# Altium PCB MARK1_AUDIO_PMOD.PcbDoc
Units mil, origin at the board's own origin, x right, y up, seen from the top; angles counter-clockwise.
Board outline 3000 x 2300 mil, 2 copper layers (Top Layer, Bottom Layer); 26 components, 23 nets, 74 pads, 0 vias.
Unrouted connection lines stored in the file: 47.
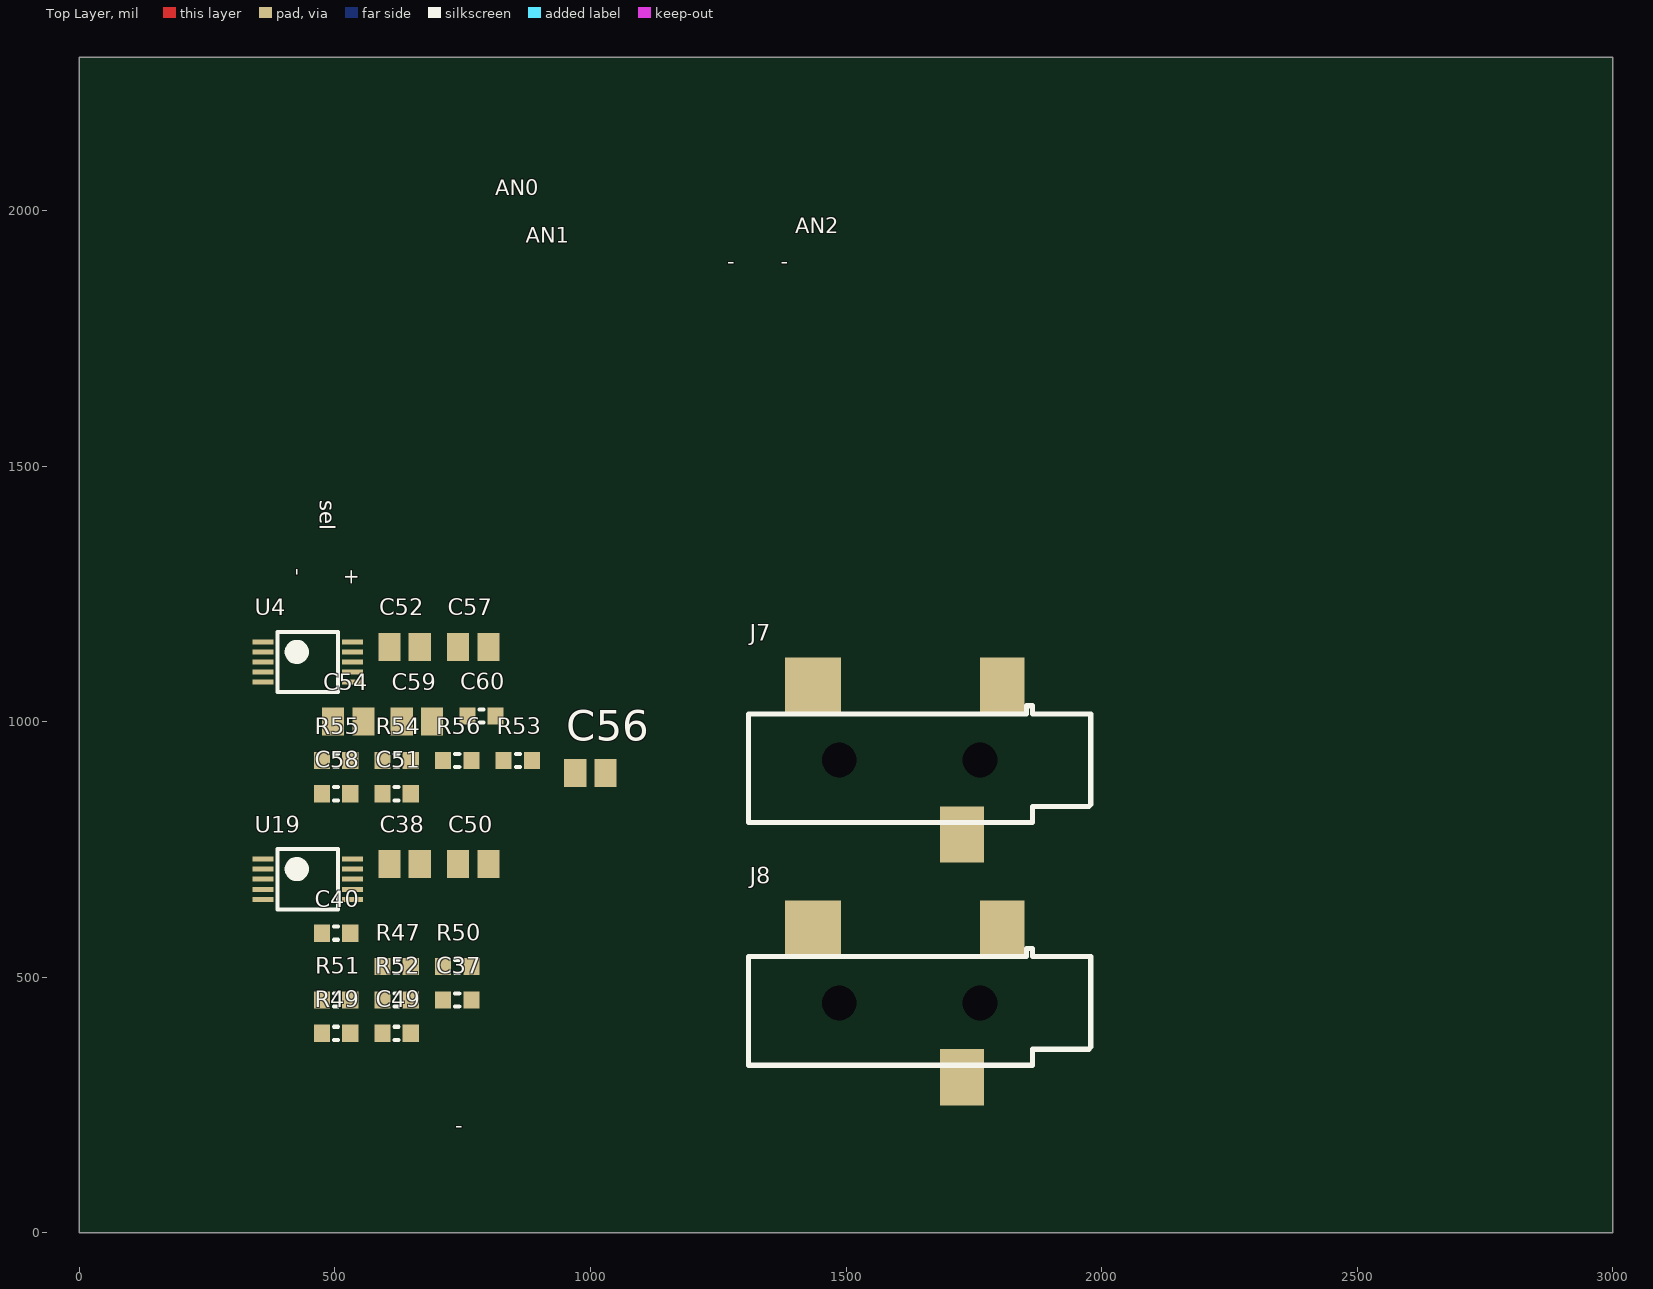
[diagram p0: Top Layer view]
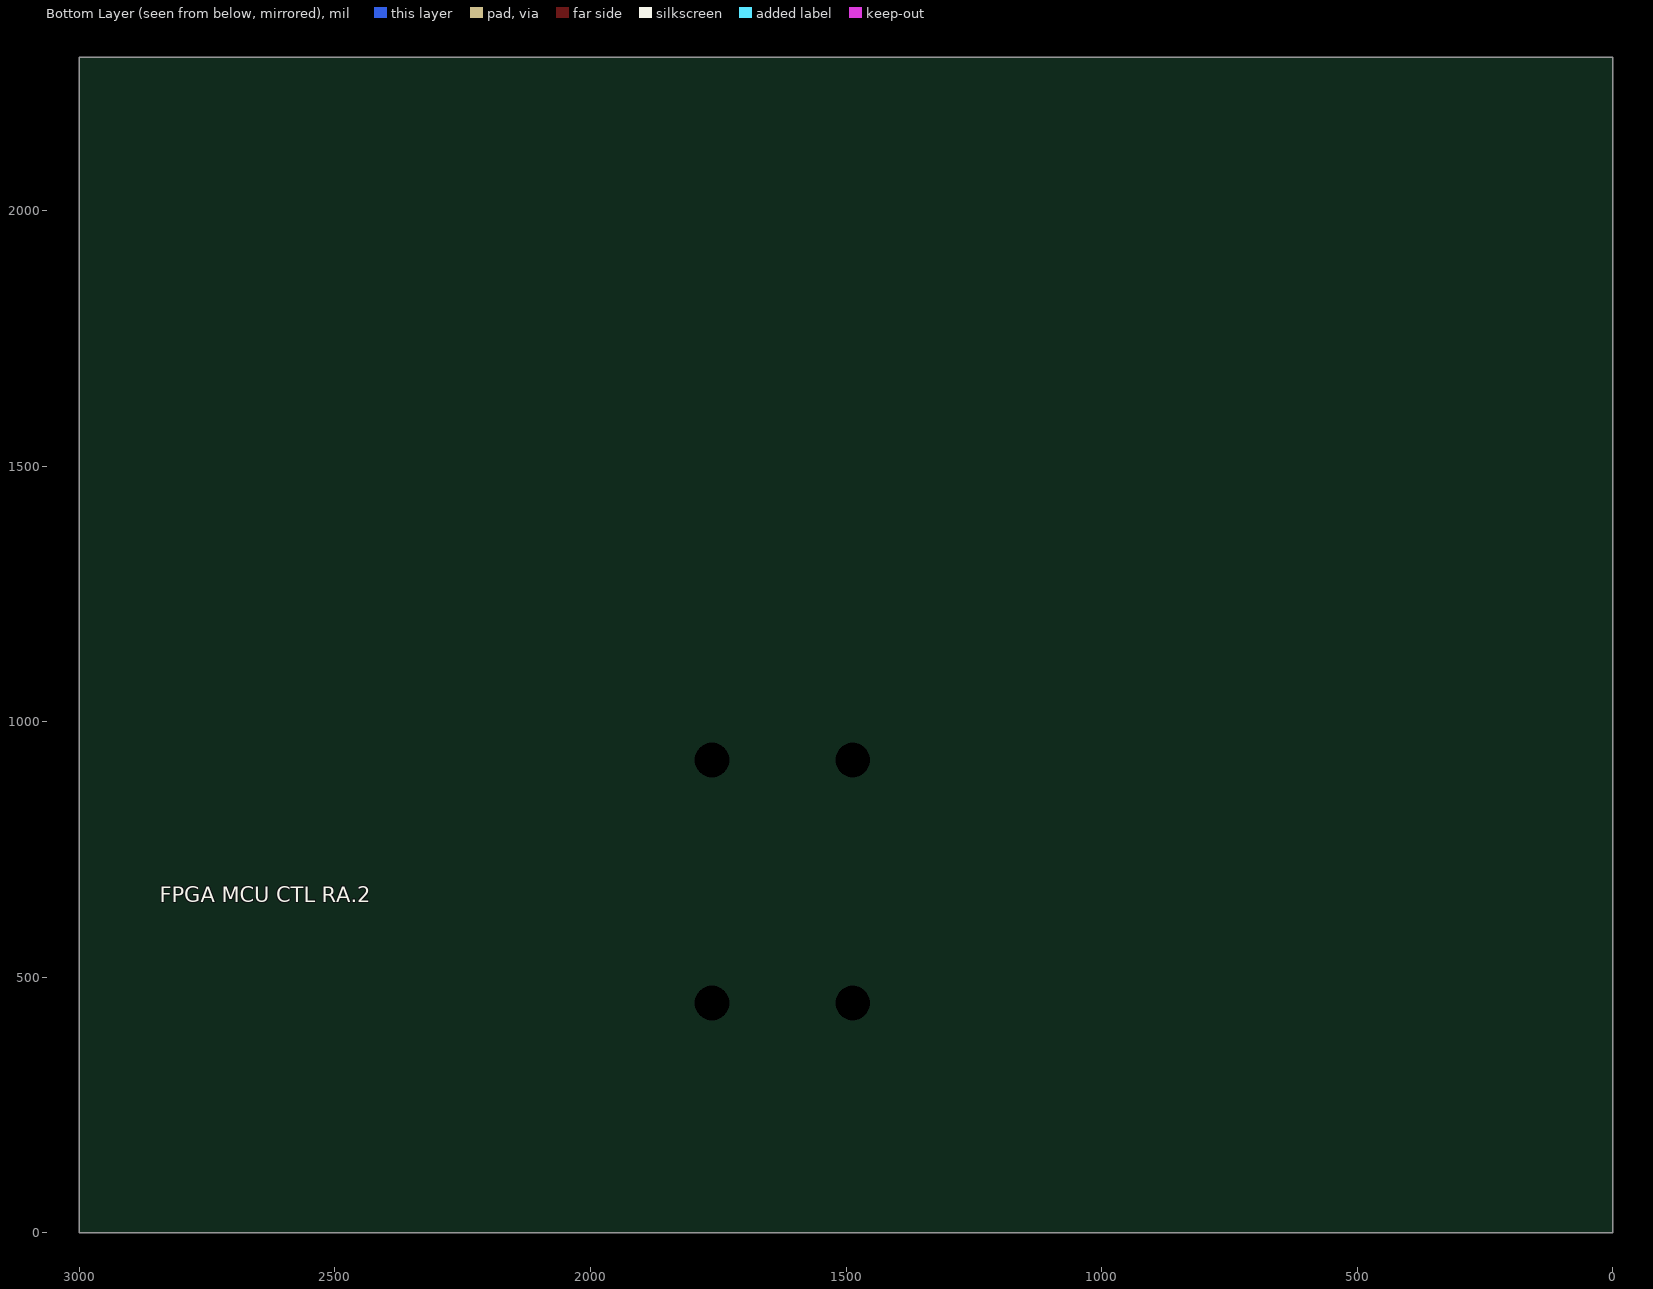
[diagram p1: Bottom Layer view, seen from below]

## Layer stack, top to bottom
Top Layer: signal copper 1.4
Dielectric: dielectric 12.6, FR-4, Dk 4.8
Bottom Layer: signal copper 1.4

## Board outline
0,0 0,2300 3000,2300 3000,0

## Design rules (kind name [scope] priority, off if disabled: settings)
Clearance Poly [InPoly] p1: gap=10
Clearance [All] p2: gap=6
ComponentClearance LEDS+Mounts [(HasFootprint('LTM-450')) vs (HasFootprint('LED T1-3/4 GREEN - 0.45" STANDOFF') OR HasFootprint('LED T1-3/4 RED -  0.45" STANDOFF'))] p1: gap=0 collisioncheckmode=3 verticalgap=0 showdistances=FALSE
ComponentClearance ComponentClearance_1 [OnLayer('Mechanical 1')] p2: gap=0 collisioncheckmode=3 verticalgap=0 showdistances=FALSE
ComponentClearance [All] p3: gap=10 collisioncheckmode=3 verticalgap=10 showdistances=FALSE
Height [All] p1: minheight=0 maxheight=1500 prefheight=500
HoleSize [All] p1: absolutevalues=TRUE maxlimit=250 minlimit=1 maxpercent=80.000 minpercent=20.000
HoleToHoleClearance [All] p1: gap=2 allowstackedmicrovias=TRUE
MinimumSolderMaskSliver [All] p1: minsoldermaskwidth=0
PlaneConnect [All] p1: planeconnectstyle=Direct reliefexpansion=20 reliefentries=4 reliefconductorwidth=10 reliefairgap=10
PolygonConnect [All] p1: connectstyle=Direct reliefconductorwidth=10 reliefentries=4 polygonreliefangle="90 Angle"
RoomDefinition MARK1_AUDIO_PMOD [InComponentClass('MARK1_AUDIO_PMOD')] p1: confinementstyle=ConfineIn formatcopy=TRUE lockcomponents=FALSE outline -22885,-22390 -20885,-22390 -20885,-21390 -22885,-21390
RoutingVias [All] p1: holewidth=12 width=16 viastyle="Through Hole" minholewidth=12 minwidth=16 maxholewidth=12 maxwidth=16
SilkToSilkClearance [All] p1: silktosilkclearance=0
SilkscreenOverComponentPads [All] p1: minsilkscreentomaskgap=0
SolderMaskExpansion [All] p1: expansion=4
Width [All] p1: maxlimit=100 minlimit=6 preferedwidth=6
20 further rules are at their usual default settings.

## Components (designator, comment, footprint, x,y, rotation, side; value= is the part's Value field where it differs from the comment)
C37 "0.1uF" C0603 739.49,455.83 r0 top
C38 "1.0uF" C0805 636.62,721.54 r0 top
C40 "0.1uF" C0603 502.64,586.38 r0 top
C49 "0.1uF" C0603 621.06,390.55 r0 top
C50 "1.0uF" C0805 770.8,721.54 r0 top
C51 "0.1uF" C0603 621.06,859.17 r0 top
C52 "1.0uF" C0805 636.62,1146.54 r0 top
C54 "1.0uF" C0805 526.26,1000.55 r0 top
C56 "1.0uF" C0805 1000,900 r180 top
C57 "1.0uF" C0805 770.8,1146.54 r0 top
C58 "180pF" C0603 502.64,859.17 r0 top
C59 "1.0uF" C0805 660.43,1000.55 r0 top
C60 "0.1uF" C0603 786.73,1011.38 r0 top
J7 "SJ-3523-SMT" SJ-3523-SMT 1900,925 r0 top
J8 "SJ-3523-SMT" SJ-3523-SMT 1900,450 r0 top
R47 "5600pF" C0603 621.06,521.1 r0 top
R49 "470" R0603 502.64,390.55 r0 top
R50 "470" R0603 739.49,521.1 r0 top
R51 "5600pF" C0603 502.64,455.83 r0 top
R52 "10k" R0603 621.06,455.83 r0 top
R53 "4.99k" R0603 857.91,924.45 r0 top
R54 "4.99k" R0603 621.06,924.45 r0 top
R55 "4.99k" R0603 502.64,924.45 r0 top
R56 "4.99k" R0603 739.49,924.45 r0 top
U4 "CS5343-CZZ" TSSOP10 447.27,1117.01 r0 top
U19 "CS4344-CZZ" TSSOP10 447.27,692.01 r0 top

## Footprints (in the part's own frame and the unit in brackets; to place one, negate y for a bottom-side part, rotate by r counter-clockwise, add the part's x,y. Pads: shape width x height; smd on the part's side, far side on the other; paste and mask are expansions set on the pad)
C0603 [mm] "0603 Generic"
  rect 0.8x0.85 smd: 1(-0.7,0) 2(0.7,0)
  silkscreen extent -0.1,-0.33 0.1,0.33, body extent -0.8,-0.42 0.82,0.4, height 0.46
C0805 [mm] "Chip Capacitor, Body 2.0x1.3mm, IPC High Density"
  rect 1.1x1.4 smd: 1(-0.75,0) 2(0.75,0)
  body extent -1.1,-0.72 1.1,0.72, height 1.4
R0603 [mm] "0603 Generic"
  rect 0.8x0.85 smd: 1(-0.7,0) 2(0.7,0)
  silkscreen extent -0.1,-0.33 0.1,0.33, body extent -0.81,-0.41 0.81,0.41, height 0.46
SJ-3523-SMT [mm] "3.5MM Stereo Audio Jack"
  rect 2.2x2.8 smd: 1(-2.4,3.7) 3(-4.4,-3.7)
  rect 2.8x2.8 smd: 2(-11.8,3.7)
  round 0 hole 1.727 unplated: H1(-3.5,0) H2(-10.5,0)
  silkscreen extent -15,-3.1 2,2.7, body extent -14.52,-4.5 2.48,4.5, height 5.04
TSSOP10 [mm] "TSSOP, 10-Leads, Body 3.0x3.0mm (max), Pitch 0.50mm, IPC High Density"
  rect 1.05x0.25 smd: 1(-2.225,1) 2(-2.225,0.5) 3(-2.225,0) 4(-2.225,-0.5) 5(-2.225,-1) 6(2.225,-1) 7(2.225,-0.5) 8(2.225,0) 9(2.225,0.5) 10(2.225,1)
  silkscreen extent -1.5,-1.5 1.5,1.5, body extent -2.5,-1.5 2.5,1.5, height 1.1

## Part data
C37 C40 C49 C51 C60: library part GRM188R71H104KA93D, "CAP CER .1UF 50V 10% X7R 0603"
C38 C50 C52 C54 C56 C57 C59: library part GRM21BR71C105KA01L, "CAP CER 1.0UF 16V 10% X7R 0805"
C58: library part C1608C0G1H181J, "CAP CER 180PF 50V 5% NP0 0603"
J7 J8: "CONN AUDIO JACK 3.5MM STEREO SMD"
R47 R51: library part GRM188R71H562KA01D, "CAP CER 5600PF 50V 10% X7R 0603"
R49 R50: library part ERJ-3EKF4700V, "RES 470 OHM 1/10W 1% 0603 SMD"
R52: library part ERJ-3EKF1002V, "RES 10.0K OHM 1/10W 1% 0603 SMD"
R53 R54 R55 R56: library part ERJ-3EKF4991V, "RES 4.99K OHM 1/10W 1% 0603 SMD"
U4: "IC ADC AUD 98DB 108KHZ 10-TSSOP"
U19: "IC DAC STER 24BIT 192KHZ 10TSSOP"

## Nets (pads, with @x,y where several pads share a name; then routed paths per layer and width w, separated by ;. In a path a pad name is that pad's centre, name@x,y a point inside that pad or via, vN(x,y) a via of type N, cw(c..) or ccw(c..) an arc to the next point about the centre after c; other vN are vias at no path point)
+3.3V_A: C37.2 C38.2 C51.1 C52.1 U4.10 U19.9
GND: C37.1 C38.1 C40.1 C49.1 C50.1 C51.2 C52.2 C54.2 C58.1 C59.2 C60.2 J7.1 J8.1 R47.2 R51.1 R52.2 R53.2 R56.2 U4.9 U19.8
LRCLK: U4.3 U19.3
MCLK: U4.4 U19.4
NetC36_2: C40.2 U19.5
NetC41_1: U19.10
NetC41_2: R49.1
NetC45_1: U19.7
NetC45_2: R50.1 R52.1
NetC49_2: C49.2 C50.2 U19.6
NetC53_1: C54.1 U4.7
NetC55_1: C56.2 U4.6
NetC56_1: C56.1 R53.1 R54.2
NetC57_1: C57.1 R55.2 R56.1
NetC57_2: C57.2 C58.2 U4.8
NetC59_1: C59.1 C60.1 U4.5
NetJ7_2: J7.2 R50.2 R51.2
NetJ7_3: J7.3 R47.1 R49.2
NetJ8_2: J8.2 R55.1
NetJ8_3: J8.3 R54.1
SCLK: U4.2 U19.2
SDIN: U19.1
SDOUT: U4.1
pads on no net: J7.H1 J7.H2 J8.H1 J8.H2

## Silkscreen, mask and mechanical layers (free items; w line width, h text height)
Top Overlay:
  text "AN0" at 813.39,2030 h30
  text "AN2" at 1400.39,1956 h30
  text "AN1" at 873.39,1937 h30
  text "-" at 1267.39,1886 h30
  text "-" at 1372.39,1886 h30
  text "sel" at 471,1433.61 h30 r270
  text "sel" at 471,1433.61 h30 r270
  text "-" at 415,1300.61 h30 r270
  text "+" at 520,1300.61 h30 r270
  text "-" at 735.39,196 h30
  text "VIN" at -1505.61,-247 h30 r270
Bottom Overlay:
  text "FPGA MCU CTL RA.2" at 2842.39,647 h30
Generic Top Title Block:
  lines w0: 7114.83,-2289.5 4721.83,-2289.5 4721.83,-1699.69 7114.83,-1699.69
  lines w8: 5419.78,-2289.5 5419.78,-1699.69 ; 5419.78,-2092.9 7114.83,-2092.9 ; 5419.78,-1896.29 7114.83,-1896.29 ; 5968.18,-2092.9 5968.18,-1896.29 ; 7114.83,-2289.5 4721.83,-2289.5 4721.83,-1699.69 7114.83,-1699.69
  lines w10: -2785,-1390 -2685,-1390 ; -2785,-390 -2685,-390 -2685,610 -2785,610 ; -2785,1610 -2685,1610 ; -2785,2610 -2685,2610 ; -2785,3610 -2685,3610 ; -2785,4610 -2685,4610 ; -1785,-2390 -1785,-2290 ; -1785,5010 -1785,5110 ; -785,-2390 -785,-2290 ; -785,5010 -785,5110 ; 215,-2390 215,-2290 ; 215,5010 215,5110 ; 1215,-2390 1215,-2290 ; 1215,5010 1215,5110 ; 2215,-2390 2215,-2290 ; 2215,5010 2215,5110 ; 3215,-2390 3215,-2290 ; 3215,5010 3215,5110 ; 4215,-2390 4215,-2290 ; 4215,5010 4215,5110 ; 5215,-2390 5215,-2290 ; 5215,5010 5215,5110 ; 6215,-2390 6215,-2290 ; 6215,5010 6215,5110 ; 7114.83,-2289.5 7114.83,-1699.69 ; 7115,-1390 7215,-1390 ; 7115,-390 7215,-390 7215,610 7115,610 ; 7115,1610 7215,1610 ; 7115,2610 7215,2610 ; 7115,3610 7215,3610 ; 7115,4610 7215,4610 ; 7215,-2290 7215,-2390 ; 7215,-2390 7215,5110 -2785,5110 -2785,-2390 7215,-2390 ; -2685,-2290 -2685,5010 7115,5010 7115,-2290 -2685,-2290
  text "1" at -2320,5030 h100
  text "2" at -1245,5030 h100
  text "3" at -295,5030 h100
  text "4" at 755,5030 h100
  text "5" at 1705,5030 h100
  text "6" at 2730,5030 h100
  text "7" at 3680,5030 h100
  text "8" at 4655,5030 h100
  text "9" at 5755,5030 h100
  text "10" at 6705,5030 h100
  text "H" at -2770,4775 h100
  text "H" at 7135,4770 h100
  text "G" at -2770,4050 h100
  text "G" at 7135,4045 h100
  text "F" at -2760,3065 h100
  text "F" at 7145,3060 h100
  text "E" at -2770,2100 h100
  text "E" at 7135,2095 h100
  text "D" at -2770,1100 h100
  text "D" at 7135,1095 h100
  text "C" at -2760,130 h100
  text "C" at 7145,125 h100
  text "B" at -2765,-915 h100
  text "B" at 7140,-920 h100
  text ".PCB_TITLE" at 5469,-1837 h175
  text "" at 5220.37,-1851.77 h152.56
  text "" at 5302.48,-1851.77 h152.56
  text "A" at -2760,-1915 h100
  text "A" at 7145,-1920 h100
  text "R" at 5469.64,-2045.4 h95.35
  text "e" at 5524.38,-2045.4 h95.35
  text "v" at 5579.13,-2045.4 h95.35
  text ":" at 5633.87,-2045.4 h95.35
  text "2" at 4771.68,-2052.46 h343.27
  text ".PCB_VERSION" at 5697,-2053 h175
  text ".ENGINEER" at 6025,-2054 h175
  text "" at 4971.1,-2064.56 h343.27
  text "" at 5121.65,-2064.56 h343.27
  text "W" at 4771.68,-2143.7 h95.35
  text "a" at 4853.8,-2143.7 h95.35
  text "v" at 4908.54,-2143.7 h95.35
  text "e" at 4963.29,-2143.7 h95.35
  text "n" at 5018.03,-2143.7 h95.35
  text "u" at 5072.78,-2143.7 h95.35
  text "m" at 5127.52,-2143.7 h95.35
  text "b" at 5209.64,-2143.7 h95.35
  text "e" at 5264.38,-2143.7 h95.35
  text "r" at 5319.13,-2143.7 h95.35
  text ".GERBER_GEN_DATE" at 5454,-2238 h175
  text "T" at 4771.68,-2242 h95.35
  text "e" at 4826.42,-2242 h95.35
  text "c" at 4881.17,-2242 h95.35
  text "h" at 4922.23,-2242 h95.35
  text "n" at 4976.97,-2242 h95.35
  text "o" at 5031.72,-2242 h95.35
  text "l" at 5086.46,-2242 h95.35
  text "o" at 5113.84,-2242 h95.35
  text "g" at 5168.58,-2242 h95.35
  text "i" at 5223.33,-2242 h95.35
  text "e" at 5250.7,-2242 h95.35
  text "s" at 5305.44,-2242 h95.35
  text "1" at -2310,-2365 h100
  text "2" at -1235,-2365 h100
  text "3" at -285,-2365 h100
  text "4" at 765,-2365 h100
  text "5" at 1715,-2365 h100
  text "6" at 2740,-2365 h100
  text "7" at 3690,-2365 h100
  text "8" at 4665,-2365 h100
  text "9" at 5765,-2365 h100
  text "10" at 6715,-2365 h100
PCB Notes Title Block:
  lines w0: 7114.83,-2289.5 4721.83,-2289.5 4721.83,-1699.69 7114.83,-1699.69
  lines w8: 5419.78,-2289.5 5419.78,-1699.69 ; 5419.78,-2092.9 7114.83,-2092.9 ; 5419.78,-1896.29 7114.83,-1896.29 ; 5968.18,-2092.9 5968.18,-1896.29 ; 7114.83,-2289.5 4721.83,-2289.5 4721.83,-1699.69 7114.83,-1699.69
  lines w10: -2785,-1390 -2685,-1390 ; -2785,-390 -2685,-390 -2685,610 -2785,610 ; -2785,1610 -2685,1610 ; -2785,2610 -2685,2610 ; -2785,3610 -2685,3610 ; -2785,4610 -2685,4610 ; -1785,-2390 -1785,-2290 ; -1785,5010 -1785,5110 ; -785,-2390 -785,-2290 ; -785,5010 -785,5110 ; 215,-2390 215,-2290 ; 215,5010 215,5110 ; 1215,-2390 1215,-2290 ; 1215,5010 1215,5110 ; 2215,-2390 2215,-2290 ; 2215,5010 2215,5110 ; 3215,-2390 3215,-2290 ; 3215,5010 3215,5110 ; 4215,-2390 4215,-2290 ; 4215,5010 4215,5110 ; 5215,-2390 5215,-2290 ; 5215,5010 5215,5110 ; 6215,-2390 6215,-2290 ; 6215,5010 6215,5110 ; 7114.83,-2289.5 7114.83,-1699.69 ; 7115,-1390 7215,-1390 ; 7115,-390 7215,-390 7215,610 7115,610 ; 7115,1610 7215,1610 ; 7115,2610 7215,2610 ; 7115,3610 7215,3610 ; 7115,4610 7215,4610 ; 7215,-2290 7215,-2390 ; 7215,-2390 7215,5110 -2785,5110 -2785,-2390 7215,-2390 ; -2685,-2290 -2685,5010 7115,5010 7115,-2290 -2685,-2290
  text "1" at -2320,5030 h100
  text "2" at -1245,5030 h100
  text "3" at -295,5030 h100
  text "4" at 755,5030 h100
  text "5" at 1705,5030 h100
  text "6" at 2730,5030 h100
  text "7" at 3680,5030 h100
  text "8" at 4655,5030 h100
  text "9" at 5755,5030 h100
  text "10" at 6705,5030 h100
  text "H" at -2770,4775 h100
  text "H" at 7135,4770 h100
  text "G" at -2770,4050 h100
  text "G" at 7135,4045 h100
  text "F" at -2760,3065 h100
  text "F" at 7145,3060 h100
  text "E" at -2770,2100 h100
  text "E" at 7135,2095 h100
  text "D" at -2770,1100 h100
  text "D" at 7135,1095 h100
  text "C" at -2760,130 h100
  text "C" at 7145,125 h100
  text "B" at -2765,-915 h100
  text "B" at 7140,-920 h100
  text ".PCB_TITLE" at 5469,-1837 h175
  text "" at 5220.37,-1851.77 h152.56
  text "" at 5302.48,-1851.77 h152.56
  text "A" at -2760,-1915 h100
  text "A" at 7145,-1920 h100
  text "R" at 5469.64,-2045.4 h95.35
  text "e" at 5524.38,-2045.4 h95.35
  text "v" at 5579.13,-2045.4 h95.35
  text ":" at 5633.87,-2045.4 h95.35
  text "2" at 4771.68,-2052.46 h343.27
  text ".PCB_VERSION" at 5697,-2053 h175
  text ".ENGINEER" at 6025,-2054 h175
  text "" at 4971.1,-2064.56 h343.27
  text "" at 5121.65,-2064.56 h343.27
  text "W" at 4771.68,-2143.7 h95.35
  text "a" at 4853.8,-2143.7 h95.35
  text "v" at 4908.54,-2143.7 h95.35
  text "e" at 4963.29,-2143.7 h95.35
  text "n" at 5018.03,-2143.7 h95.35
  text "u" at 5072.78,-2143.7 h95.35
  text "m" at 5127.52,-2143.7 h95.35
  text "b" at 5209.64,-2143.7 h95.35
  text "e" at 5264.38,-2143.7 h95.35
  text "r" at 5319.13,-2143.7 h95.35
  text ".GERBER_GEN_DATE" at 5454,-2238 h175
  text "T" at 4771.68,-2242 h95.35
  text "e" at 4826.42,-2242 h95.35
  text "c" at 4881.17,-2242 h95.35
  text "h" at 4922.23,-2242 h95.35
  text "n" at 4976.97,-2242 h95.35
  text "o" at 5031.72,-2242 h95.35
  text "l" at 5086.46,-2242 h95.35
  text "o" at 5113.84,-2242 h95.35
  text "g" at 5168.58,-2242 h95.35
  text "i" at 5223.33,-2242 h95.35
  text "e" at 5250.7,-2242 h95.35
  text "s" at 5305.44,-2242 h95.35
  text "1" at -2310,-2365 h100
  text "2" at -1235,-2365 h100
  text "3" at -285,-2365 h100
  text "4" at 765,-2365 h100
  text "5" at 1715,-2365 h100
  text "6" at 2740,-2365 h100
  text "7" at 3690,-2365 h100
  text "8" at 4665,-2365 h100
  text "9" at 5765,-2365 h100
  text "10" at 6715,-2365 h100
PCB Notes:
  lines w50: -2500,990 1700,990 ; -2450,4190 6500,4190 ; 1750,-160 1750,840
  text "PCB Fabrication Notes" at -2446,4335 h750
  text "Unless otherwise specified, all dimensions are in inches" at -2450,3940 h200
  text "Overall Dimension:   Z.Z\" x  Y.Y\"" at -2450,3740 h200
  text "Finished Thickness:  .062\"" at -2450,3540 h200
  text "Layer Count:" at -2450,3340 h200
  text "Drill Count:" at -2450,3140 h200
  text ".Hole_Count" at -1350,3140 h200
  text "PAD Count:" at -2450,2940 h200
  text ".PAD_Count" at -1350,2940 h200
  text "Solder Mask:  Green LPI SMOBC" at -2450,2740 h200
  text "Silkscreen:  White Non-Conductive Ink LPI Process" at -2450,2540 h200
  text "RS274-X Gerber Format, 2.5 Leading Zeros Suppressed" at -2450,2340 h200
  text "Excellon Drill Format, 2.5 Trailing Zeros Suppressed" at -2450,2140 h200
  text "Layer Details" at -2500,1140 h350
  text "POLARITY" at 400,1090 h350
  text ".GTL" at -2450,640 h200
  text "Top Copper" at -1500,640 h200
  text "POSITIVE" at 500,640 h200
  text ".GBL" at -2450,440 h200
  text "Bottom Copper" at -1500,440 h200
  text "POSITIVE" at 500,440 h200
  text "N-Layer Stackup" at 1900,340 h200
  text ".GTO" at -2450,-910 h200
  text "Top Silkscreen" at -1450,-910 h200
  text ".GBO" at -2450,-1110 h200
  text "Bottom Silkscreen" at -1450,-1110 h200
  text ".GTS" at -2450,-1460 h200
  text "Top Soldermask" at -1450,-1460 h200
  text ".GBS" at -2450,-1660 h200
  text "Bottom Soldermask" at -1450,-1660 h200
  text ".TXT" at -2450,-1860 h200
  text "NC-DRILL" at -1450,-1860 h200
Fabrication Reference  Title Block:
  lines w0: 7114.83,-2289.5 4721.83,-2289.5 4721.83,-1699.69 7114.83,-1699.69
  lines w8: 5419.78,-2289.5 5419.78,-1699.69 ; 5419.78,-2092.9 7114.83,-2092.9 ; 5419.78,-1896.29 7114.83,-1896.29 ; 5968.18,-2092.9 5968.18,-1896.29 ; 7114.83,-2289.5 4721.83,-2289.5 4721.83,-1699.69 7114.83,-1699.69
  lines w10: -2785,-1390 -2685,-1390 ; -2785,-390 -2685,-390 -2685,610 -2785,610 ; -2785,1610 -2685,1610 ; -2785,2610 -2685,2610 ; -2785,3610 -2685,3610 ; -2785,4610 -2685,4610 ; -1785,-2390 -1785,-2290 ; -1785,5010 -1785,5110 ; -785,-2390 -785,-2290 ; -785,5010 -785,5110 ; 215,-2390 215,-2290 ; 215,5010 215,5110 ; 1215,-2390 1215,-2290 ; 1215,5010 1215,5110 ; 2215,-2390 2215,-2290 ; 2215,5010 2215,5110 ; 3215,-2390 3215,-2290 ; 3215,5010 3215,5110 ; 4215,-2390 4215,-2290 ; 4215,5010 4215,5110 ; 5215,-2390 5215,-2290 ; 5215,5010 5215,5110 ; 6215,-2390 6215,-2290 ; 6215,5010 6215,5110 ; 7114.83,-2289.5 7114.83,-1699.69 ; 7115,-1390 7215,-1390 ; 7115,-390 7215,-390 7215,610 7115,610 ; 7115,1610 7215,1610 ; 7115,2610 7215,2610 ; 7115,3610 7215,3610 ; 7115,4610 7215,4610 ; 7215,-2290 7215,-2390 ; 7215,-2390 7215,5110 -2785,5110 -2785,-2390 7215,-2390 ; -2685,-2290 -2685,5010 7115,5010 7115,-2290 -2685,-2290
  text "1" at -2320,5030 h100
  text "2" at -1245,5030 h100
  text "3" at -295,5030 h100
  text "4" at 755,5030 h100
  text "5" at 1705,5030 h100
  text "6" at 2730,5030 h100
  text "7" at 3680,5030 h100
  text "8" at 4655,5030 h100
  text "9" at 5755,5030 h100
  text "10" at 6705,5030 h100
  text "H" at -2770,4775 h100
  text "H" at 7135,4770 h100
  text "Fabrication Reference Drawing" at -1100,4590 h500
  text "G" at -2770,4050 h100
  text "G" at 7135,4045 h100
  text "F" at -2760,3065 h100
  text "F" at 7145,3060 h100
  text "E" at -2770,2100 h100
  text "E" at 7135,2095 h100
  text "D" at -2770,1100 h100
  text "D" at 7135,1095 h100
  text "C" at -2760,130 h100
  text "C" at 7145,125 h100
  text "B" at -2765,-915 h100
  text "B" at 7140,-920 h100
  text ".PCB_TITLE" at 5469,-1837 h175
  text "" at 5220.37,-1851.77 h152.56
  text "" at 5302.48,-1851.77 h152.56
  text "A" at -2760,-1915 h100
  text "A" at 7145,-1920 h100
  text "R" at 5469.64,-2045.4 h95.35
  text "e" at 5524.38,-2045.4 h95.35
  text "v" at 5579.13,-2045.4 h95.35
  text ":" at 5633.87,-2045.4 h95.35
  text "2" at 4771.68,-2052.46 h343.27
  text ".PCB_VERSION" at 5697,-2053 h175
  text ".ENGINEER" at 6025,-2054 h175
  text "" at 4971.1,-2064.56 h343.27
  text "" at 5121.65,-2064.56 h343.27
  text "W" at 4771.68,-2143.7 h95.35
  text "a" at 4853.8,-2143.7 h95.35
  text "v" at 4908.54,-2143.7 h95.35
  text "e" at 4963.29,-2143.7 h95.35
  text "n" at 5018.03,-2143.7 h95.35
  text "u" at 5072.78,-2143.7 h95.35
  text "m" at 5127.52,-2143.7 h95.35
  text "b" at 5209.64,-2143.7 h95.35
  text "e" at 5264.38,-2143.7 h95.35
  text "r" at 5319.13,-2143.7 h95.35
  text ".GERBER_GEN_DATE" at 5454,-2238 h175
  text "T" at 4771.68,-2242 h95.35
  text "e" at 4826.42,-2242 h95.35
  text "c" at 4881.17,-2242 h95.35
  text "h" at 4922.23,-2242 h95.35
  text "n" at 4976.97,-2242 h95.35
  text "o" at 5031.72,-2242 h95.35
  text "l" at 5086.46,-2242 h95.35
  text "o" at 5113.84,-2242 h95.35
  text "g" at 5168.58,-2242 h95.35
  text "i" at 5223.33,-2242 h95.35
  text "e" at 5250.7,-2242 h95.35
  text "s" at 5305.44,-2242 h95.35
  text "1" at -2310,-2365 h100
  text "2" at -1235,-2365 h100
  text "3" at -285,-2365 h100
  text "4" at 765,-2365 h100
  text "5" at 1715,-2365 h100
  text "6" at 2740,-2365 h100
  text "7" at 3690,-2365 h100
  text "8" at 4665,-2365 h100
  text "9" at 5765,-2365 h100
  text "10" at 6715,-2365 h100
Board Outline:
  lines w10: 0,0 2200,0 2200,1300 0,1300 0,0